# Altium PCB FPv1.3.2.PcbDoc (part 5 of 9)
Units mm, origin at the board's own origin, x right, y up, seen from the top; angles counter-clockwise.
Board outline 81.28 x 53.34 mm, 4 copper layers (Top Layer, GROUND PLANE, POWER PLANE, Bottom Layer); 98 components, 183 nets, 614 pads, 312 vias.
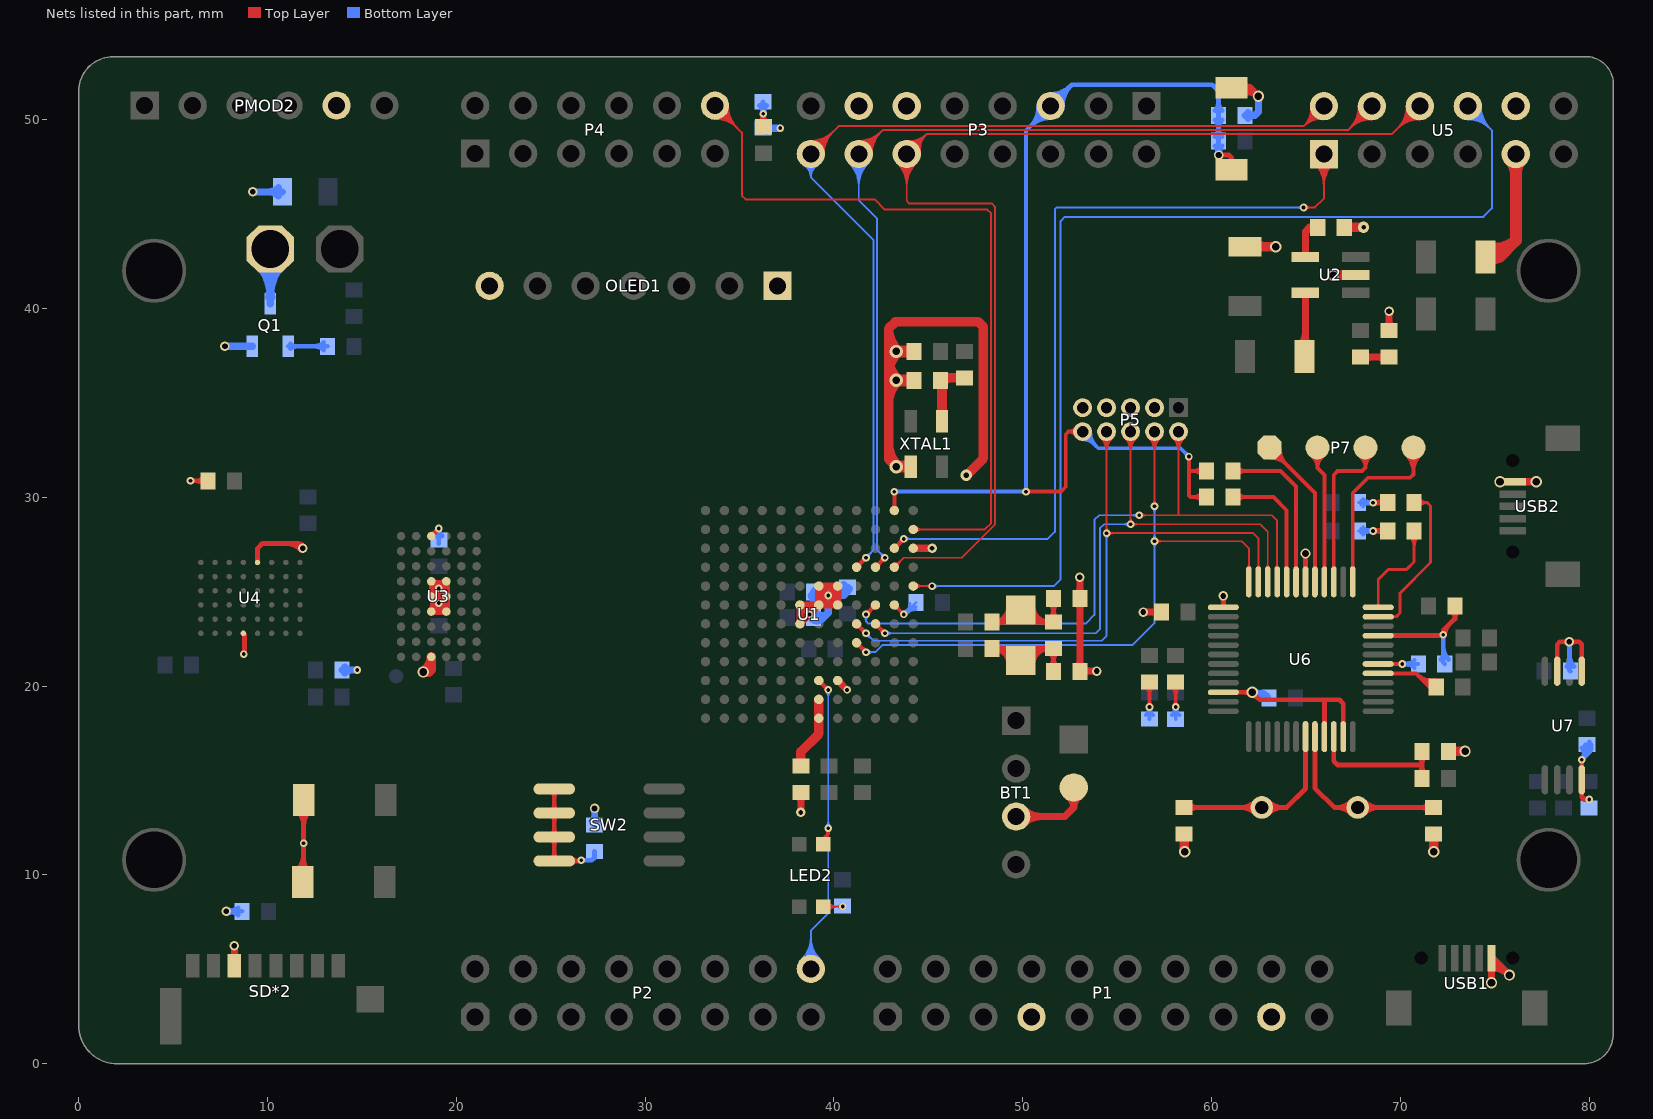
[diagram p7: the nets of this part, all layers, seen from the top]

## Via types
v1: diameter 0.403, hole 0.2, Top Layer to Bottom Layer, tented both sides, 261 vias
v2: diameter 0.503, hole 0.3, Top Layer to Bottom Layer, tented both sides, 25 vias
v3: diameter 0.6, hole 0.4, Top Layer to Bottom Layer, tented both sides, 11 vias
v4: diameter 0.508, hole 0.33, Top Layer to Bottom Layer, tented both sides, 5 vias
v5: diameter 0.703, hole 0.4, Top Layer to Bottom Layer, tented both sides, 3 vias
v6: diameter 0.603, hole 0.4, Top Layer to Bottom Layer, tented both sides, 2 vias
v7: diameter 0.503, hole 0.25, Top Layer to Bottom Layer, tented both sides, 2 vias
v8: diameter 0.6, hole 0.24, Top Layer to Bottom Layer, tented both sides, 1 vias
v9: diameter 0.508, hole 0.349, Top Layer to Bottom Layer, tented both sides, 1 vias
v10: diameter 0.603, hole 0.3, Top Layer to Bottom Layer, tented both sides, 1 vias

## Nets (pads, with @x,y where several pads share a name; then routed paths per layer and width w, separated by ;. In a path a pad name is that pad's centre, name@x,y a point inside that pad or via, vN(x,y) a via of type N, cw(c..) or ccw(c..) an arc to the next point about the centre after c; other vN are vias at no path point) (continued)
FTM3_CH7: LED2.3 P2.16 U1.G3 | length 33.8
  Top Layer w0.102: U1.G3@39.2,20.101 cw(c39.2,19.62) 39.54,19.96 cw(c39.88,20.3) U1.G3@39.399,20.3 ; U1.G3@39.2,20.3 v1(39.7,19.8) ; U1.G3@39.295,20.101 cw(c39.018,19.621) v1@39.554,19.762 ; LED2.3@39.322,11.936 ccw(c39.127,12.475) v1(39.7,12.475) LED2.3@39.7,11.891 ; LED2.3@39.357,11.841 ccw(c39.18,12.33) v1@39.7,12.33 ; LED2.3@39.392,11.745 ccw(c39.232,12.185) 39.7,12.185 ; U1.G3@39.399,20.205 ccw(c39.879,20.482) v1@39.738,19.946 ; LED2.3@39.426,11.65 ccw(c39.285,12.04) 39.7,12.04 ; 39.506,19.98 cw(c39.349,19.708) v1@39.653,19.788 ; 39.511,19.977 cw(c39.458,19.885) v1@39.558,19.85 ; 39.52,19.994 ccw(c39.792,20.151) v1@39.712,19.847 ; 39.523,19.989 ccw(c39.615,20.042) v1@39.65,19.942 ; v1@39.549,19.8 ccw(c39.185,19.8) 39.443,20.057 ccw(c39.7,20.315) v1@39.7,19.951 ; v1@39.583,12.38 cw(c39.414,12.245) 39.623,12.189 cw(c39.832,12.133) v1@39.754,12.334 ; v1@39.589,12.374 cw(c39.398,12.2) 39.647,12.133 ; v1@39.593,12.368 cw(c39.336,12.111) 39.7,12.111 cw(c40.064,12.111) v1@39.807,12.368 ; 39.666,12.201 cw(c39.893,12.14) v1@39.775,12.344 ; 39.537,19.962 ccw(c39.619,20.104) 39.661,19.946 cw(c39.619,20.104) 39.537,19.962 ; 39.538,19.963 cw(c39.396,19.881) 39.554,19.839 ccw(c39.396,19.881) 39.538,19.963
  Bottom Layer w0.102: P2.16@38.287,5.519 ccw(c37.093,6.713) 38.781,6.713 ccw(c40.469,6.713) P2.16@39.275,5.519 ; P2.16@38.358,5.448 ccw(c37.338,6.468) 38.781,6.468 ccw(c40.224,6.468) P2.16@39.204,5.448 ; P2.16@38.43,5.376 ccw(c37.584,6.222) 38.781,6.222 ccw(c39.978,6.222) P2.16@39.132,5.376 ; P2.16@38.502,5.304 ccw(c37.829,5.977) 38.781,5.977 ccw(c39.733,5.977) P2.16@39.06,5.304 ; P2.16@38.781,5.025 38.781,7.056 39.7,7.975 v1(39.7,12.475) v1(39.7,19.8) ; v1@39.593,12.368 cw(c39.336,12.111) 39.7,12.111 cw(c40.064,12.111) v1@39.807,12.368 ; v1@39.593,12.582 ccw(c39.336,12.839) 39.7,12.839 ccw(c40.064,12.839) v1@39.807,12.582 ; v1@39.593,19.693 cw(c39.336,19.436) 39.7,19.436 cw(c40.064,19.436) v1@39.807,19.693
GND: BT1.3 C1.1 C2.1 C3.1 C4.1 C7.1 C8.2 C12.2 C13.1 C15.1 C16.1 C17.1 C18.1 C22.1 C24.2 C27.1 C28.1 C29.1 C32.2 C33.1 C34.1 C35.2 C36.1 C37.1 C38.1 OLED1.1 OLED1.7 P1.7 P1.17 P3.11 P3.13 P5.3 P5.5 P5.7 P5.9 P6.2 PMOD2.5 Q1.2 R6.1 R10.1 R30.1 R31.1 R34.1 S1.2 S2.2 S3.1 SD*2.6 U1.F6 U1.F7 U1.G7 U1.G8 U1.H3 U1.H7 U1.H8 U1.M10 U2.2 U3.A3 U3.D3 U3.D4 U3.E3 U3.E4 U3.F3 U3.F4 U3.J3 U4.D1 U4.E6 U5.9 U5.10 U6.9 U6.18 U6.25 U6.34 U6.45 U6.47 U7.5 U7.7 USB1.5 USB2.5 XTAL1.2 | length 203
  Top Layer w0.254: v1(5.925,30.875) C3.1@6.85,30.875 ; C3.1@6.657,30.682 ccw(c6.191,30.216) 6.191,30.875 ccw(c6.191,31.534) C3.1@6.657,31.068 ; v1@8.697,21.753 ccw(c8.497,21.953) 8.78,21.953 ; U4.E6@8.712,22.787 cw(c8.548,22.623) 8.78,22.623 ; U4.E6@8.725,22.8 8.78,22.745 8.78,21.73 v1(8.75,21.7) ; U4.D1@9.475,26.55 9.475,27.304 9.726,27.556 11.611,27.556 v2(11.862,27.305) ; 10.956,27.556 cw(c10.956,26.399) v2@11.774,27.217 ; S2.2@11.549,10.217 ccw(c10.664,11.102) 11.916,11.102 ; 11.569,27.556 cw(c11.569,27.013) v2@11.953,27.397 ; S1.2@11.599,13.383 cw(c10.834,12.618) 11.916,12.618 cw(c12.998,12.618) S1.2@12.233,13.383 ; S2.2@11.729,10.037 ccw(c11.277,10.489) 11.916,10.489 ; v2@11.737,27.305 ccw(c11.437,27.305) 11.649,27.518 ccw(c11.862,27.73) v2@11.862,27.429 ; S2.2@11.916,9.675 S1.2@11.916,13.975 ; 11.916,10.861 ccw(c12.827,10.861) S2.2@12.183,10.217 ; U3.F3@18.675,23.95 U3.F3@18.794,24.069 ; U3.E3@18.675,24.652 cw(c18.675,24.415) 18.842,24.583 cw(c19.01,24.75) U3.E3@18.773,24.75 ; U3.D3@18.675,25.452 cw(c18.675,25.215) 18.842,25.383 cw(c19.01,25.55) U3.D3@18.773,25.55 ; U3.D3@18.675,25.55 18.75,25.475 18.794,25.431 v1@19.075,25.15 ; U3.A3@18.675,27.95 v1(19.075,28.35) ; U3.A3@18.675,28.048 ccw(c18.675,28.285) 18.842,28.117 ccw(c19.01,27.95) U3.A3@18.773,27.95 ; U3.E3@18.75,24.825 U3.E3@18.675,24.75 18.794,24.631 v1@19.075,24.35 ; 18.862,24.563 ccw(c19.075,24.775) v1@19.075,24.475 ; 18.905,25.32 ccw(c19.075,25.49) v1@19.075,25.249 ; U3.D4@19.356,25.431 U3.D4@19.475,25.55 ; v2@60.537,24.687 cw(c60.324,24.474) 60.625,24.474 cw(c60.926,24.474) v2@60.713,24.687 ; U6.34@60.625,19.675 v3(62.15,19.675) 62.55,19.275 66.775,19.275 66.975,19.075 U6.47@66.975,17.325 ; U6.25@60.625,24.175 v2(60.625,24.775) ; v3@62.028,19.553 ccw(c61.732,19.257) 61.732,19.675 ccw(c61.732,20.093) v3@62.028,19.797 ; v3@62.15,19.502 cw(c62.15,19.084) 62.445,19.38 cw(c62.741,19.675) v3@62.323,19.675 ; v9@64.885,26.935 cw(c64.668,26.718) 64.975,26.718 cw(c65.282,26.718) v9@65.065,26.935 ; U6.18@64.975,25.525 v9(64.975,27.025) ; U6.45@65.975,17.325 65.975,19.225 ; U6.9@68.825,22.675 72.25,22.675 72.275,22.7 v1(72.275,22.725) 72.275,22.948 72.887,23.561 ; 71.974,22.675 ccw(c71.974,23.026) v1@72.222,22.778 ; v1@72.349,22.725 cw(c73.068,22.725) 72.56,23.233 ; C29.1@72.702,23.986 cw(c72.307,23.561) 72.887,23.561 ; C29.1@72.887,24.236 72.887,23.561 ; C29.1@73.073,23.986 ccw(c73.468,23.561) 72.887,23.561 ; U7.7@78.304,20.791 78.304,22.204 78.45,22.35 v2(78.95,22.35) 79.475,22.35 79.604,22.221 U7.5@79.604,20.791 ; v2@78.862,22.262 ccw(c78.649,22.049) 78.649,22.35 ccw(c78.649,22.651) v2@78.862,22.438 ; v2@79.038,22.262 cw(c79.251,22.049) 79.251,22.35 cw(c79.251,22.651) v2@79.038,22.438
  Top Layer w0.381: SD*2.6@8.134,5.575 ccw(c7.855,5.854) 8.25,5.854 ; SD*2.6@8.247,5.187 8.25,5.19 v2(8.25,6.25) v2@8.247,6.247 ; 8.25,5.84 ccw(c8.625,5.84) SD*2.6@8.36,5.575 ; U3.F3@18.651,23.974 ccw(c18.304,24.321) 18.794,24.321 ; U3.E3@18.651,24.726 cw(c18.304,24.379) 18.794,24.379 ; U3.E3@18.651,24.774 ccw(c18.411,25.014) 18.75,25.014 ; U3.D3@18.651,25.526 cw(c18.411,25.286) 18.75,25.286 ; U3.F3@18.675,23.95 U3.F4@19.475,23.95 ; U3.D3@18.699,25.574 ccw(c19.046,25.921) 19.046,25.431 ; U3.E3@18.75,24.697 cw(c19.246,24.697) v1@19.079,25.165 ; U3.D3@18.75,25.475 U3.E3@18.75,24.825 ; U3.F3@18.794,23.966 cw(c19.252,23.966) v1@19.079,24.39 ; U3.E3@18.794,24.631 18.794,24.069 v1@19.075,24.35 ; v1@19.064,25.174 ccw(c18.794,25.161) 18.794,25.431 U3.D4@19.356,25.431 ; v1@19.086,24.399 cw(c19.475,24.359) U3.E4@19.475,24.75 ; v1@19.086,25.174 cw(c19.356,25.161) U3.D4@19.356,25.431 ; 19.104,25.431 ccw(c19.104,25.921) U3.D4@19.451,25.574 ; U3.D4@19.475,25.55 U3.E4@19.475,24.75 ; R30.1@38.102,14.227 cw(c37.744,13.869) 38.25,13.869 cw(c38.756,13.869) R30.1@38.398,14.227 ; U1.F6@38.2,23.3 U1.F6@38.21,23.31 ; U1.F7@38.2,24.3 U1.F7@38.21,24.29 ; v7(38.25,13.312) R30.1@38.25,14.375 ; U1.H3@40.2,20.3 v1(40.7,19.8) ; U1.M10@44.2,27.3 v7(45.2,27.3) ; BT1.3@49.65,13.095 52.22,13.095 52.7,13.575 ; BT1.3@50.046,12.699 cw(c51.001,11.744) 51.001,13.095 cw(c51.001,14.446) BT1.3@50.046,13.491 ; P6.2@52.384,14.173 cw(c51.976,13.575) 52.7,13.575 ; P6.2@52.7,14.635 52.7,13.575 ; C38.1@52.877,20.963 ccw(c52.519,21.321) 53.025,21.321 ccw(c53.531,21.321) 53.173,20.963 ccw(c53.567,21.357) 53.567,20.8 ; C37.1@52.877,24.442 cw(c52.519,24.084) 53.025,24.084 cw(c53.531,24.084) C37.1@53.173,24.442 ; C37.1@52.877,24.838 ccw(c52.519,25.196) 53.025,25.196 ccw(c53.531,25.196) C37.1@53.173,24.838 ; P6.2@53.016,14.173 ccw(c53.424,13.575) 52.7,13.575 ; v2(53.025,25.775) C38.1@53.025,20.765 53.06,20.8 v2(53.925,20.8) ; C38.1@53.173,20.667 cw(c53.495,20.345) 53.495,20.8 ; v2(56.375,23.925) C28.1@57.35,23.925 ; C28.1@57.202,23.777 ccw(c56.844,23.419) 56.844,23.925 ccw(c56.844,24.431) C28.1@57.202,24.073 ; S3.1@61.05,51.691 62.025,51.691 ; S3.1@61.327,51.688 cw(c61.661,51.11) 62.133,51.582 ; S3.1@61.518,51.358 cw(c61.919,50.666) v6(62.484,51.232) 62.025,51.691 ; S3.1@61.65,51.485 cw(c62.025,51.246) 62.025,51.691 ; S3.1@61.65,51.897 ccw(c62.025,52.136) 62.025,51.691 ; R31.1@69.252,38.973 ccw(c68.894,39.331) 69.4,39.331 ccw(c69.906,39.331) R31.1@69.548,38.973 ; R31.1@69.4,38.825 v2(69.4,39.85) ; USB1.5@74.823,5.471 cw(c74.825,5.041) 75.129,5.346 ; v3(74.825,4.3) USB1.5@74.825,5.6 ; USB1.5@74.825,5.091 cw(c74.832,3.757) v3(75.775,4.7) USB1.5@74.875,5.6 ; v3(75.275,30.825) USB2.5@75.95,30.825 v3(77.2,30.825) ; U3.E3@18.75,24.825 v1@19.075,25.15 ; U3.E3@18.75,24.825 18.825,24.75 U3.E4@19.475,24.75 ; v1@19.075,24.35 U3.E4@19.475,24.75 ; v1@19.075,24.35 U3.F4@19.475,23.95 ; v1@19.075,25.15 U3.D4@19.356,25.431 ; v1@19.075,25.15 19.112,25.112 U3.E4@19.475,24.75 ; U3.F4@19.475,23.95 U3.E4@19.475,24.75 ; U1.F6@38.21,23.31 U1.F7@38.21,24.29 ; U1.F6@38.21,23.31 v1(38.7,23.8) ; U1.F7@38.21,24.29 U1.G7@39.19,24.29 ; U1.F7@38.21,24.29 v1(38.7,23.8) ; v1(38.7,23.8) U1.G7@39.19,24.29 ; U1.G7@39.19,24.29 U1.G7@39.2,24.3 ; U1.G7@39.19,24.29 39.2,24.29 U1.G7@39.2,24.3 ; U1.G7@39.2,24.3 U1.H7@40.2,24.3 ; U1.G7@39.2,24.3 U1.G8@39.2,25.3 ; U1.G7@39.2,24.3 v1(39.7,24.8) ; U1.G8@39.2,25.3 U1.H8@40.2,25.3 ; U1.G8@39.2,25.3 v1(39.7,24.8) ; v1(39.7,24.8) U1.H7@40.2,24.3 ; v1(39.7,24.8) U1.H8@40.2,25.3 ; U1.H7@40.2,24.3 U1.H8@40.2,25.3
  Top Layer w0.508: v3@18.228,20.79 ccw(c17.806,21.55) U3.J3@18.675,21.55 ; v3(18.25,20.75) 18.55,20.75 18.675,20.875 ; v3@18.267,20.793 ccw(c18.409,21.141) 18.675,20.875 ; U3.J3@18.675,21.55 18.675,20.875 ; 42.901,32.824 ccw(c44.5,32.824) v5@43.369,31.694 ; 42.901,35 cw(c44.5,35) v5@43.369,36.131 ; 42.901,36.525 cw(c44.5,36.525) v5@43.369,37.656 ; 42.901,37.4 ccw(c44.5,37.4) v5@43.369,36.269 ; 42.901,38.925 ccw(c44.5,38.925) v5@43.369,37.794 ; v5(43.3,31.625) 42.901,32.024 42.901,38.938 43.256,39.294 47.65,39.294 47.915,39.029 47.915,32.066 v10(47.015,31.166) ; C33.1@58.55,12.175 58.55,11.25 v3(58.575,11.225) ; C12.2@61.8,43.275 v3(63.4,43.275) ; C12.2@62.317,43.083 cw(c62.779,42.621) 62.779,43.275 cw(c62.779,43.929) C12.2@62.317,43.467 ; v3(66.45,41.75) 66.475,41.775 U2.2@67.629,41.775 ; C13.1@67.025,44.3 v8(68.05,44.3) ; C35.2@71.647,12.072 cw(c71.337,11.762) 71.775,11.762 ; C35.2@71.75,12.175 71.775,12.15 v3(71.775,11.225) ; C24.2@72.55,16.55 v3(73.425,16.55)
  Top Layer w0.635: v5@42.977,37.725 C27.1@44.25,37.725 ; v5@43.002,36.2 C36.1@44.25,36.2 ; v5(43.3,31.625) XTAL1.2@44.074,31.625 ; C8.2@74.353,42.673 ccw(c74.697,43.615) 75.406,42.906 ; C8.2@74.5,42.725 75.225,42.725 76.11,43.61 ; C8.2@74.571,43.27 ccw(c75.074,44.646) 76.11,43.61 ; U5.9@75.804,47.869 cw(c75.066,47.131) 76.11,47.131 cw(c77.154,47.131) U5.9@76.416,47.869 ; U5.9@76.11,48.175 76.11,43.61
  Bottom Layer w0.254: v2(7.825,8.075) C17.1@8.65,8.075 ; v2@7.887,7.967 cw(c8.111,7.58) 8.227,8.012 ; v2@7.887,8.183 ccw(c8.111,8.57) 8.227,8.138 ; v2@7.913,7.987 cw(c8.126,7.774) 8.126,8.075 cw(c8.126,8.376) v2@7.913,8.163 ; C17.1@8.457,7.882 ccw(c7.991,7.416) 7.991,8.075 ccw(c7.991,8.734) C17.1@8.457,8.268 ; C15.1@18.896,27.956 ccw(c18.552,28.35) v1(19.075,28.35) ; v1(19.075,25.175) v1@19.175,25.175 ; C15.1@19.075,27.55 v1(19.075,28.35) ; C15.1@19.254,27.956 cw(c19.598,28.35) v1(19.075,28.35) ; R6.1@27.132,12.843 ccw(c26.666,13.309) 27.325,13.309 ccw(c27.984,13.309) R6.1@27.518,12.843 ; v2@27.217,13.463 cw(c26.792,13.217) 27.266,13.09 ; v2@27.237,13.437 cw(c27.024,13.224) 27.325,13.224 cw(c27.626,13.224) v2@27.413,13.437 ; R6.1@27.325,12.65 v2(27.325,13.525) ; 27.384,13.09 cw(c27.858,13.217) v2@27.433,13.463 ; v3@62.242,19.529 cw(c62.437,19.221) 62.531,19.573 cw(c62.626,19.925) v3@62.303,19.755 ; v3@62.272,19.553 cw(c62.568,19.257) 62.568,19.675 cw(c62.568,20.093) v3@62.272,19.797 ; 62.587,19.675 cw(c62.587,19.161) C22.1@63.033,19.416 ; C22.1@62.75,19.675 v3(62.15,19.675) cw(c62.15,18.912) C22.1@62.813,19.29 ; C32.2@72.157,21.418 ccw(c71.872,21.703) 72.275,21.703 ; 72.275,22.065 ccw(c73.19,22.065) C32.2@72.543,21.418 ; v1(72.275,22.725) 72.275,21.25 C32.2@72.35,21.175 ; C34.1@78.811,21.034 ccw(c78.475,21.37) 78.95,21.37 ; v2@78.862,22.262 cw(c78.649,22.049) 78.95,22.049 cw(c79.251,22.049) v2@79.038,22.262 ; 78.95,21.63 ccw(c79.793,21.63) C34.1@79.197,21.034 ; v2(78.95,22.35) 78.95,20.845 C34.1@79.004,20.791
  Bottom Layer w0.381: v2(7.75,38) Q1.2@9.2,38 ; v2(9.225,46.175) C4.1@10.8,46.175 ; C4.1@10.581,45.956 ccw(c10.053,45.428) 10.053,46.175 ccw(c10.053,46.922) C4.1@10.581,46.394 ; C16.1@13.95,20.85 v1@14.754,20.85 ; C16.1@14.098,20.702 cw(c14.456,20.344) 14.456,20.85 cw(c14.456,21.356) C16.1@14.098,20.998 ; R34.1@36.25,49.55 v1@37.155,49.55 ; R34.1@36.448,49.402 cw(c36.806,49.044) 36.806,49.55 cw(c36.806,50.056) R34.1@36.448,49.698 ; C1.1@38.692,23.808 ccw(c38.125,24.375) 38.927,24.375 ; C1.1@38.698,23.789 cw(c38.662,23.526) C1.1@38.927,23.526 ; C1.1@38.708,23.808 ccw(c39.095,24.195) C1.1@39.095,23.647 ; C1.1@38.71,23.803 ccw(c38.927,23.876) C1.1@38.927,23.647 ; C1.1@38.779,23.846 ccw(c38.421,24.203) 38.927,24.203 ccw(c39.433,24.203) C1.1@39.075,23.846 ; C2.1@38.779,24.795 cw(c38.421,24.438) 38.927,24.438 cw(c39.433,24.438) C2.1@39.075,24.795 ; C1.1@38.814,23.568 ccw(c39.103,23.898) 39.412,23.588 ; C1.1@39.065,23.855 ccw(c39.371,24.204) 39.7,23.876 ; C1.1@39.075,23.499 cw(c39.433,23.142) 39.433,23.647 cw(c39.433,24.153) C1.1@39.075,23.796 ; C2.1@39.075,24.895 cw(c39.898,24.072) 39.898,25.236 ; C2.1@39.085,25.081 ccw(c39.7,25.613) v1(39.7,24.8) ; C2.1@39.121,24.8 v1(39.7,24.8) ; 40.27,24.8 ccw(c40.27,25.4) R10.1@40.825,25.171 ; R10.1@40.473,25.316 cw(c39.7,25.636) v1(39.7,24.8) ; R10.1@40.518,25.088 ccw(c40.16,24.731) 40.16,25.236 ccw(c40.16,25.742) R10.1@40.518,25.385 ; C7.1@61.775,50.225 62.29,50.225 62.484,50.419 v6(62.484,51.232) ; C7.1@61.923,50.077 cw(c62.281,49.719) 62.281,50.225 cw(c62.281,50.731) C7.1@61.923,50.373 ; C1.1@38.927,23.647 39.472,23.647 39.7,23.876 ; C1.1@38.927,23.647 C2.1@38.927,24.994 39.17,25.236 R10.1@40.716,25.236 40.716,24.987 40.529,24.8 v1(39.7,24.8) ; 39.7,23.876 v1(39.7,24.8)
  Bottom Layer w0.508: v1(19.075,24.4) v1@19.075,25.15
  other v1: 11.916,11.675 14.757,20.853 37.16,49.555
  other v5: 43.3,36.2 43.3,37.725
GPIOH0: P7.3 U6.15 | length 11
  Top Layer w0.203: U6.15@66.475,25.525 66.475,31.194 66.675,31.394 67.97,31.394 68.148,31.572 ; P7.3@67.828,32.212 cw(c67.348,31.572) 68.148,31.572 ; P7.3@67.95,32.375 cw(c67.653,31.979) 68.148,31.979 cw(c68.643,31.979) P7.3@68.346,32.375 ; P7.3@68.148,32.639 68.148,31.572 ; P7.3@68.468,32.212 ccw(c68.948,31.572) 68.148,31.572
GPIOH1: P7.4 U6.13 | length 13
  Top Layer w0.203: U6.13@67.475,25.525 67.475,30.239 68.275,31.039 70.51,31.039 70.688,31.217 P7.4@70.688,32.639 ; P7.4@70.311,32.262 cw(c69.4,31.351) 70.688,31.351 cw(c71.976,31.351) P7.4@71.065,32.262 ; P7.4@70.455,32.406 cw(c69.891,31.842) 70.688,31.842 cw(c71.485,31.842) P7.4@70.922,32.406
GPIOH2: L2.2 U6.12 | length 7.6
  Top Layer w0.152: U6.12@68.773,24.227 ccw(c68.647,24.353) 68.825,24.353 ccw(c69.003,24.353) U6.12@68.877,24.227 ; U6.12@68.825,24.175 68.825,25.645 69.367,26.187 70.333,26.187 70.728,26.583 L2.2@70.728,28.219 ; L2.2@70.499,27.94 cw(c69.946,27.388) 70.728,27.388 cw(c71.51,27.388) L2.2@70.957,27.94 ; L2.2@70.607,28.048 cw(c70.314,27.756) 70.728,27.756 cw(c71.142,27.756) L2.2@70.849,28.048
GPIOH3: L6.2 U6.11 | length 9.8
  Top Layer w0.152: U6.11@68.825,23.675 69.776,23.675 69.977,23.876 69.977,24.917 71.603,26.543 71.603,29.54 71.425,29.718 ; U6.11@69.552,23.623 cw(c69.678,23.497) 69.678,23.675 cw(c69.678,23.853) U6.11@69.552,23.727 ; L6.2@70.728,29.718 71.425,29.718 ; L6.2@70.975,29.509 cw(c71.425,29.13) 71.425,29.718 ; L6.2@70.975,29.927 ccw(c71.425,30.306) 71.425,29.718
GPIOL0: R8.2 U6.20 | length 8.1
  Top Layer w0.203: R8.2@61.127,30.023 63.271,30.023 63.975,29.319 U6.20@63.975,25.525 ; R8.2@61.338,29.812 cw(c61.847,29.302) 61.847,30.023 cw(c61.847,30.743) R8.2@61.338,30.234
GPIOL1: R11.2 U6.19 | length 9.9
  Top Layer w0.203: R11.2@61.127,31.394 63.652,31.394 64.475,30.572 U6.19@64.475,25.525 ; R11.2@61.338,31.183 cw(c61.847,30.674) 61.847,31.394 cw(c61.847,32.115) R11.2@61.338,31.605
GPIOL2: P7.1 U6.17 | length 11.4
  Top Layer w0.203: P7.1@63.068,32.106 cw(c63.068,30.818) 63.979,31.728 cw(c64.889,32.639) P7.1@63.602,32.639 ; P7.1@63.068,32.309 cw(c63.068,31.512) 63.632,32.075 cw(c64.196,32.639) P7.1@63.398,32.639 ; P7.1@63.068,32.639 65.475,30.232 U6.17@65.475,25.525
GPIOL3: P7.2 U6.16 | length 9.8
  Top Layer w0.203: P7.2@65.28,32.218 cw(c64.757,31.547) 65.608,31.547 ; P7.2@65.405,32.379 cw(c65.081,31.963) 65.608,31.963 cw(c66.135,31.963) P7.2@65.811,32.379 ; P7.2@65.608,32.639 65.608,31.547 ; P7.2@65.936,32.218 ccw(c66.46,31.547) 65.608,31.547 ; U6.16@65.975,25.525 65.975,31.18 65.608,31.547
JTAG_TCK: P5.4 U1.J5 U6.24 | length 45
  Top Layer w0.102: U1.J5@41.2,22.101 cw(c41.2,21.62) 41.54,21.96 cw(c41.88,22.3) U1.J5@41.399,22.3 ; U1.J5@41.2,22.3 v1(41.7,21.8) ; U1.J5@41.295,22.101 cw(c41.018,21.621) v1@41.554,21.762 ; U1.J5@41.399,22.205 ccw(c41.879,22.482) v1@41.738,21.946 ; 41.506,21.98 cw(c41.349,21.708) v1@41.653,21.788 ; 41.511,21.977 cw(c41.458,21.885) v1@41.558,21.85 ; 41.52,21.994 ccw(c41.792,22.151) v1@41.712,21.847 ; 41.523,21.989 ccw(c41.615,22.042) v1@41.65,21.942 ; v1@41.549,21.8 ccw(c41.185,21.8) 41.443,22.057 ccw(c41.7,22.315) v1@41.7,21.951 ; P5.4@56.662,33.162 cw(c55.896,32.396) 56.98,32.396 cw(c58.064,32.396) P5.4@57.298,33.162 ; P5.4@56.734,33.234 cw(c56.141,32.641) 56.98,32.641 cw(c57.819,32.641) P5.4@57.226,33.234 ; P5.4@56.806,33.306 cw(c56.386,32.886) 56.98,32.886 cw(c57.574,32.886) P5.4@57.154,33.306 ; v1@56.873,29.637 ccw(c56.616,29.894) 56.98,29.894 ccw(c57.344,29.894) v1@57.087,29.637 ; v1(56.98,27.675) 61.6,27.675 61.975,27.3 U6.24@61.975,25.525 ; v1(56.98,29.53) P5.4@56.98,33.48 ; v1@57.087,27.568 cw(c57.344,27.311) 57.344,27.675 cw(c57.344,28.039) v1@57.087,27.782 ; U6.24@61.905,26.27 ccw(c61.736,26.439) 61.975,26.439 ccw(c62.214,26.439) U6.24@62.045,26.27 ; 41.537,21.962 ccw(c41.619,22.104) 41.661,21.946 cw(c41.619,22.104) 41.537,21.962 ; 41.538,21.963 cw(c41.396,21.881) 41.554,21.839 ccw(c41.396,21.881) 41.538,21.963
  Bottom Layer w0.102: v1(41.7,21.8) 42.196,21.8 42.57,22.174 55.804,22.174 56.98,23.35 v1(56.98,27.675) v1(56.98,29.53) ; v1@41.807,21.693 cw(c42.064,21.436) 42.064,21.8 cw(c42.064,22.164) v1@41.807,21.907 ; v1@56.873,27.568 cw(c56.616,27.311) 56.98,27.311 cw(c57.344,27.311) v1@57.087,27.568 ; v1@56.873,27.782 ccw(c56.616,28.039) 56.98,28.039 ccw(c57.344,28.039) v1@57.087,27.782 ; v1@56.873,29.423 cw(c56.616,29.166) 56.98,29.166 cw(c57.344,29.166) v1@57.087,29.423
JTAG_TDI: P5.8 U1.J6 U6.23 | length 45.1
  Top Layer w0.102: U1.J6@41.2,23.101 cw(c41.2,22.62) 41.54,22.96 cw(c41.88,23.3) U1.J6@41.399,23.3 ; U1.J6@41.2,23.3 v1(41.7,22.8) ; U1.J6@41.295,23.101 cw(c41.018,22.621) v1@41.554,22.762 ; U1.J6@41.399,23.205 ccw(c41.879,23.482) v1@41.738,22.946 ; 41.506,22.98 cw(c41.349,22.708) v1@41.653,22.788 ; 41.511,22.977 cw(c41.458,22.885) v1@41.558,22.85 ; 41.52,22.994 ccw(c41.792,23.151) v1@41.712,22.847 ; 41.523,22.989 ccw(c41.615,23.042) v1@41.65,22.942 ; v1@41.549,22.8 ccw(c41.185,22.8) 41.443,23.057 ccw(c41.7,23.315) v1@41.7,22.951 ; P5.8@54.122,33.162 cw(c53.356,32.396) 54.44,32.396 cw(c55.524,32.396) P5.8@54.758,33.162 ; P5.8@54.194,33.234 cw(c53.601,32.641) 54.44,32.641 cw(c55.279,32.641) P5.8@54.686,33.234 ; P5.8@54.266,33.306 cw(c53.846,32.886) 54.44,32.886 cw(c55.034,32.886) P5.8@54.614,33.306 ; v1@54.333,28.207 ccw(c54.076,28.464) 54.44,28.464 ccw(c54.804,28.464) 54.547,28.207 ccw(c54.804,28.464) 54.804,28.1 ccw(c54.804,27.736) v1@54.547,27.993 ; P5.8@54.44,33.48 v1(54.44,28.1) 62.2,28.1 62.475,27.825 U6.23@62.475,25.525 ; U6.23@62.405,26.27 ccw(c62.236,26.439) 62.475,26.439 ccw(c62.714,26.439) U6.23@62.545,26.27 ; 41.537,22.962 ccw(c41.619,23.104) 41.661,22.946 cw(c41.619,23.104) 41.537,22.962 ; 41.538,22.963 cw(c41.396,22.881) 41.554,22.839 ccw(c41.396,22.881) 41.538,22.963
  Bottom Layer w0.102: v1@41.7,22.649 cw(c41.7,22.285) 41.957,22.543 cw(c42.215,22.8) v1@41.851,22.8 ; v1(41.7,22.8) 42.097,22.403 54.178,22.403 54.44,22.665 v1(54.44,28.1) ; v1@54.333,27.993 cw(c54.076,27.736) 54.44,27.736 cw(c54.804,27.736) v1@54.547,27.993
JTAG_TDO: P5.6 U1.K6 U6.22 | length 44.4
  Top Layer w0.102: U1.K6@42.2,23.101 cw(c42.2,22.62) 42.54,22.96 cw(c42.88,23.3) U1.K6@42.399,23.3 ; U1.K6@42.2,23.3 v1(42.7,22.8) ; U1.K6@42.295,23.101 cw(c42.018,22.621) v1@42.554,22.762 ; U1.K6@42.399,23.205 ccw(c42.879,23.482) v1@42.738,22.946 ; 42.506,22.98 cw(c42.349,22.708) v1@42.653,22.788 ; 42.511,22.977 cw(c42.458,22.885) v1@42.558,22.85 ; 42.52,22.994 ccw(c42.792,23.151) v1@42.712,22.847 ; 42.523,22.989 ccw(c42.615,23.042) v1@42.65,22.942 ; v1@42.549,22.8 ccw(c42.185,22.8) 42.443,23.057 ccw(c42.7,23.315) v1@42.7,22.951 ; P5.6@55.392,33.162 cw(c54.626,32.396) 55.71,32.396 cw(c56.794,32.396) P5.6@56.028,33.162 ; P5.6@55.464,33.234 cw(c54.871,32.641) 55.71,32.641 cw(c56.549,32.641) P5.6@55.956,33.234 ; P5.6@55.536,33.306 cw(c55.116,32.886) 55.71,32.886 cw(c56.304,32.886) P5.6@55.884,33.306 ; v1@55.603,28.682 ccw(c55.346,28.939) 55.71,28.939 ccw(c56.074,28.939) 55.817,28.682 ccw(c56.074,28.939) 56.074,28.575 ccw(c56.074,28.211) v1@55.817,28.468 ; P5.6@55.71,33.48 v1(55.71,28.575) 62.575,28.575 62.975,28.175 U6.22@62.975,25.525 ; U6.22@62.905,26.27 ccw(c62.736,26.439) 62.975,26.439 ccw(c63.214,26.439) U6.22@63.045,26.27 ; 42.537,22.962 ccw(c42.619,23.104) 42.661,22.946 cw(c42.619,23.104) 42.537,22.962 ; 42.538,22.963 cw(c42.396,22.881) 42.554,22.839 ccw(c42.396,22.881) 42.538,22.963
  Bottom Layer w0.102: v1(42.7,22.8) 53.864,22.8 54.086,23.022 54.086,28.356 54.305,28.575 v1(55.71,28.575) v1@55.725,28.575 ; v1@42.807,22.693 cw(c43.064,22.436) 43.064,22.8 cw(c43.064,23.164) v1@42.807,22.907 ; v1@55.603,28.468 ccw(c55.346,28.211) 55.346,28.575 ccw(c55.346,28.939) v1@55.603,28.682
JTAG_TMS: P5.2 U1.K7 U6.21 | length 45.6
  Top Layer w0.102: v1@41.662,23.946 ccw(c41.521,24.482) U1.K7@42.001,24.205 ; v1@41.688,23.847 ccw(c41.608,24.151) 41.88,23.994 ; v1(41.7,23.8) U1.K7@42.2,24.3 ; v1@41.7,23.951 ccw(c41.7,24.315) 41.957,24.057 ccw(c42.215,23.8) v1@41.851,23.8 ; v1@41.747,23.788 cw(c42.051,23.708) 41.894,23.98 ; v1@41.75,23.942 ccw(c41.785,24.042) 41.877,23.989 ; v1@41.842,23.85 cw(c41.942,23.885) 41.889,23.977 ; v1@41.846,23.762 cw(c42.382,23.621) U1.K7@42.105,24.101 ; U1.K7@42.001,24.3 cw(c41.52,24.3) 41.86,23.96 cw(c42.2,23.62) U1.K7@42.2,24.101 ; v1(56.175,29.05) 58.25,29.05 ; v1@56.282,28.943 cw(c56.539,28.686) 56.539,29.05 cw(c56.539,29.414) v1@56.282,29.157 ; P5.2@57.932,33.162 cw(c57.166,32.396) 58.25,32.396 cw(c59.334,32.396) P5.2@58.568,33.162 ; P5.2@58.004,33.234 cw(c57.411,32.641) 58.25,32.641 cw(c59.089,32.641) P5.2@58.496,33.234 ; P5.2@58.076,33.306 cw(c57.656,32.886) 58.25,32.886 cw(c58.844,32.886) P5.2@58.424,33.306 ; P5.2@58.25,33.48 58.25,29.05 ; U6.21@63.405,26.27 ccw(c63.236,26.439) 63.475,26.439 ccw(c63.714,26.439) U6.21@63.545,26.27 ; U6.21@63.475,25.525 63.475,28.75 63.175,29.05 58.25,29.05 ; v1@41.739,23.946 ccw(c41.781,24.104) 41.863,23.962 cw(c41.781,24.104) v1@41.739,23.946 ; v1@41.846,23.839 cw(c42.004,23.881) 41.862,23.963 ccw(c42.004,23.881) v1@41.846,23.839
  Bottom Layer w0.102: v1@41.593,23.693 cw(c41.336,23.436) 41.7,23.436 cw(c42.064,23.436) v1@41.807,23.693 ; v1(41.7,23.8) 41.7,23.426 41.808,23.317 53.34,23.317 53.797,23.774 53.797,28.804 54.044,29.05 v1(56.175,29.05) ; v1@56.068,28.943 ccw(c55.811,28.686) 55.811,29.05 ccw(c55.811,29.414) v1@56.068,29.157
LPTMR0: P4.12 U1.M11 | length 48.7
  Top Layer w0.102: P4.12@33.701,50.046 cw(c33.701,48.358) 34.895,49.551 cw(c36.088,50.745) P4.12@34.4,50.745 ; P4.12@33.701,50.147 cw(c33.701,48.705) 34.721,49.725 cw(c35.741,50.745) P4.12@34.299,50.745 ; P4.12@33.701,50.249 cw(c33.701,49.052) 34.548,49.898 cw(c35.394,50.745) P4.12@34.197,50.745 ; P4.12@33.701,50.351 cw(c33.701,49.398) 34.374,50.072 cw(c35.048,50.745) P4.12@34.095,50.745 ; P4.12@33.701,50.745 35.125,49.321 35.125,45.975 35.325,45.775 42.15,45.775 42.688,45.237 48.133,45.237 48.322,45.049 48.322,28.634 47.988,28.3 U1.M11@44.2,28.3 ; U1.M11@44.341,28.159 cw(c44.681,27.819) 44.681,28.3 cw(c44.681,28.781) U1.M11@44.341,28.441
N_RST: C7.2 P3.5 P5.10 R8.1 R11.1 R32.2 S3.2 U1.L12 | length 82.3
  Top Layer w0.203: U1.L12@43.095,29.405 ccw(c42.842,29.658) 43.2,29.658 ccw(c43.558,29.658) U1.L12@43.305,29.405 ; v1@43.129,30.229 cw(c42.959,30.059) 43.2,30.059 cw(c43.441,30.059) v1@43.271,30.229 ; U1.L12@43.2,29.3 v1(43.2,30.3) ; v1(50.175,30.3) 52.017,30.3 52.275,30.558 52.275,33.325 52.43,33.48 ; v1@50.246,30.229 cw(c50.416,30.059) 50.416,30.3 cw(c50.416,30.541) v1@50.246,30.371 ; P5.10@52.837,33.261 ccw(c52.43,32.992) 52.43,33.48 ; P5.10@52.837,33.699 cw(c52.43,33.968) 52.43,33.48 ; P5.10@53.17,33.48 52.43,33.48 ; v1@58.73,32.086 cw(c58.56,31.915) 58.801,31.915 cw(c59.042,31.915) v1@58.872,32.086 ; 58.801,31.394 R11.1@59.727,31.394 ; v1(58.801,32.156) 58.801,30.099 58.877,30.023 R8.1@59.727,30.023 ; R8.1@59.516,29.812 ccw(c59.006,29.302) 59.006,30.023 ccw(c59.006,30.743) R8.1@59.516,30.234 ; R11.1@59.516,31.183 ccw(c59.006,30.674) 59.006,31.394 ccw(c59.006,32.115) R11.1@59.516,31.605
  Top Layer w0.254: v4(60.375,48.125) 60.925,48.125 61.05,48 ; v4@60.465,48.035 cw(c60.682,47.818) 60.682,48.125 cw(c60.682,48.432) v4@60.465,48.215 ; S3.2@60.885,47.758 ccw(c60.789,48) 61.05,48 ; S3.2@61.05,47.341 61.05,48 ; S3.2@61.215,47.758 cw(c61.311,48) 61.05,48
  Bottom Layer w0.203: v1(43.2,30.3) v1(50.175,30.3) 50.175,49.424 P3.5@51.476,50.725 ; v1@43.271,30.229 cw(c43.441,30.059) 43.441,30.3 cw(c43.441,30.541) v1@43.271,30.371 ; v1@50.104,30.229 ccw(c49.934,30.059) 49.934,30.3 ccw(c49.934,30.541) 50.104,30.371 ccw(c49.934,30.541) 50.175,30.541 ccw(c50.416,30.541) v1@50.246,30.371 ; P3.5@50.828,50.725 cw(c49.262,50.725) 50.369,49.618 cw(c51.476,48.511) P3.5@51.476,50.077 ; P3.5@51.031,50.725 cw(c49.956,50.725) 50.716,49.965 cw(c51.476,49.205) P3.5@51.476,50.28 ; P5.10@53.17,33.082 cw(c53.17,32.24) 53.765,32.835 ; P5.10@53.17,33.43 54,32.6 58.357,32.6 v1(58.801,32.156) ; P5.10@53.365,33.48 ccw(c53.957,33.48) 53.539,33.061 ; P5.10@53.568,33.48 ccw(c54.651,33.48) 53.885,32.715 ; v1@58.701,32.156 ccw(c58.46,32.156) 58.63,32.327 ccw(c58.801,32.497) v1@58.801,32.256
  Bottom Layer w0.254: P3.5@51.476,50.725 52.601,51.85 60.025,51.85 60.375,51.5 C7.2@60.375,50.225 v4(60.375,48.125) ; P3.5@51.476,51.094 ccw(c51.476,51.985) 52.106,51.355 ccw(c52.736,50.725) P3.5@51.845,50.725 ; P3.5@51.476,51.348 ccw(c51.476,52.852) 52.54,51.789 ccw(c53.603,50.725) P3.5@52.099,50.725 ; R32.2@60.176,48.621 cw(c59.695,48.14) v4@60.375,48.14 ; R32.2@60.176,49.107 ccw(c59.695,49.588) 60.375,49.588 ; C7.2@60.182,49.982 cw(c59.716,49.516) 60.375,49.516 cw(c61.034,49.516) C7.2@60.568,49.982 ; C7.2@60.182,50.468 ccw(c59.716,50.934) 60.375,50.934 ccw(c61.034,50.934) C7.2@60.568,50.468 ; v4@60.265,48.188 ccw(c59.988,48.349) R32.2@60.297,48.432 ; v4@60.285,48.215 ccw(c60.068,48.432) 60.375,48.432 ccw(c60.682,48.432) v4@60.465,48.215 ; 60.302,48.413 ccw(c60.585,48.489) v4@60.438,48.235 ; v4@60.311,48.235 ccw(c60.178,48.467) 60.436,48.397 ; v4@60.375,48.169 cw(c61.014,48.169) R32.2@60.562,48.621 ; 60.375,49.559 ccw(c61.014,49.559) R32.2@60.562,49.107 ; R32.2@60.45,48.451 ccw(c60.784,48.361) v4@60.485,48.188
NetC13_2: C13.2 U2.4 | length 2.2
  Top Layer w0.381: U2.4@64.971,42.725 64.971,44.071 ; 65.2,44.3 64.971,44.071 ; C13.2@65.489,44.091 ccw(c65.241,43.801) 64.971,44.071
NetC24_1: C24.1 R1.2 U6.46 | length 9.6
  Top Layer w0.254: U6.46@66.475,17.325 66.475,16.025 66.675,15.825 71.15,15.825 ; R1.2@70.957,15.343 ccw(c70.491,15.809) 71.15,15.809 ccw(c71.809,15.809) R1.2@71.343,15.343 ; C24.1@70.957,16.307 cw(c70.491,15.841) 71.15,15.841 cw(c71.809,15.841) C24.1@71.343,16.307 ; R1.2@71.15,15.1 C24.1@71.15,16.55
NetC32_1: C32.1 U6.6 | length 4.5
  Top Layer w0.203: U6.6@68.825,21.175 v1(70.1,21.175) ; v1@70.029,21.104 ccw(c69.859,20.934) 69.859,21.175 ccw(c69.859,21.416) v1@70.029,21.246
  Bottom Layer w0.203: v1(70.1,21.175) C32.1@70.925,21.175 ; v1@70.15,21.088 cw(c70.328,20.78) 70.42,21.124 ; v1@70.15,21.262 ccw(c70.328,21.57) 70.42,21.226 ; v1@70.171,21.104 cw(c70.341,20.934) 70.341,21.175 cw(c70.341,21.416) v1@70.171,21.246 ; C32.1@70.739,20.964 ccw(c70.23,20.455) 70.23,21.175 ccw(c70.23,21.895) C32.1@70.739,21.386
NetC33_2: C33.2 U6.43 Y2.2 | length 14.2
  Top Layer w0.254: C33.2@58.55,13.575 63.975,13.575 64.975,14.575 U6.43@64.975,17.325 ; C33.2@58.793,13.382 cw(c59.259,12.916) 59.259,13.575 cw(c59.259,14.234) C33.2@58.793,13.768 ; Y2.2@62.326,13.241 ccw(c61.518,12.433) 61.518,13.575 ccw(c61.518,14.717) Y2.2@62.326,13.909 ; Y2.2@62.994,13.241 cw(c63.802,12.433) 63.802,13.575 cw(c63.802,14.717) Y2.2@62.994,13.909
NetC35_1: C35.1 U6.44 Y2.1 | length 14
  Top Layer w0.254: U6.44@65.475,17.325 65.475,14.6 66.5,13.575 C35.1@71.75,13.575 ; Y2.1@67.406,13.241 ccw(c66.598,12.433) 66.598,13.575 ccw(c66.598,14.717) Y2.1@67.406,13.909 ; Y2.1@68.074,13.241 cw(c68.882,12.433) 68.882,13.575 cw(c68.882,14.717) Y2.1@68.074,13.909 ; C35.1@71.507,13.382 ccw(c71.041,12.916) 71.041,13.575 ccw(c71.041,14.234) C35.1@71.507,13.768
NetC36_2: C36.2 FB2.2 XTAL1.4 | length 4.2
  Top Layer w0.508: C36.2@45.547,36.047 cw(c45.115,35.615) 45.725,35.615 ; XTAL1.4@45.725,34.025 C36.2@45.725,36.125 ; C36.2@45.753,36.147 cw(c46.184,35.716) 46.184,36.325 ; C36.2@45.775,36.325 FB2.2@46.925,36.325
NetC37_2: C37.2 R26.1 R27.1 Y1.1 | length 17.6
  Top Layer w0.254: R26.1@48.572,23.199 cw(c49.038,22.733) 49.038,23.392 cw(c49.038,24.051) R26.1@48.572,23.585 ; R26.1@48.681,23.392 ccw(c48.681,24.235) Y1.1@49.512,24.091 ; 48.983,23.392 ccw(c48.983,24.183) Y1.1@49.762,24.048 ; Y1.1@49.261,24.135 cw(c48.379,24.288) R26.1@48.379,23.392 51.424,23.392 cw(c51.424,24.291) Y1.1@50.538,24.136 ; Y1.1@49.284,23.392 ccw(c49.284,24.131) Y1.1@50.012,24.005 ; Y1.1@49.788,24.004 ccw(c50.517,24.132) Y1.1@50.517,23.392 ; Y1.1@50.038,24.048 ccw(c50.819,24.185) 50.819,23.392 ; Y1.1@50.288,24.092 ccw(c51.122,24.238) 51.122,23.392 ; 50.911,23.392 cw(c50.911,22.726) R27.1@51.382,23.197 ; 50.921,23.392 ccw(c50.921,24.044) R27.1@51.382,23.583 ; R27.1@51.432,23.583 ccw(c50.966,24.049) 51.625,24.049 ccw(c52.284,24.049) R27.1@51.818,23.583 ; C37.2@51.432,24.397 cw(c50.966,23.931) 51.625,23.931 cw(c52.284,23.931) C37.2@51.818,24.397 ; R27.1@51.625,23.39 C37.2@51.625,24.64
NetC38_2: C38.2 R27.2 R28.1 Y1.2 | length 17.6
  Top Layer w0.254: R28.1@48.572,21.802 cw(c49.038,21.336) 49.038,21.995 cw(c49.038,22.654) R28.1@48.572,22.188 ; R28.1@48.679,21.995 cw(c48.679,21.151) Y1.2@49.511,21.291 ; 48.979,21.995 cw(c48.979,21.201) Y1.2@49.762,21.333 ; Y1.2@49.261,21.249 ccw(c48.379,21.101) R28.1@48.379,21.995 51.427,21.995 ccw(c51.427,21.094) Y1.2@50.539,21.246 ; Y1.2@49.279,21.995 cw(c49.279,21.252) Y1.2@50.012,21.375 ; Y1.2@49.788,21.375 cw(c50.523,21.249) Y1.2@50.523,21.995 ; Y1.2@50.038,21.332 cw(c50.824,21.197) 50.824,21.995 ; Y1.2@50.288,21.289 cw(c51.126,21.145) 51.126,21.995 ; 50.904,21.995 cw(c50.904,21.319) R27.2@51.382,21.797 ; 50.928,21.995 ccw(c50.928,22.637) R27.2@51.382,22.183 ; C38.2@51.432,21.008 ccw(c50.966,21.474) 51.625,21.474 ccw(c52.284,21.474) C38.2@51.818,21.008 ; R27.2@51.432,21.797 cw(c50.966,21.331) 51.625,21.331 cw(c52.284,21.331) R27.2@51.818,21.797 ; C38.2@51.625,20.765 R27.2@51.625,21.99
NetF2_1: F2.1 U2.5 | length 4.6
  Top Layer w0.381: F2.1@64.688,38.037 ccw(c64.006,38.719) 64.971,38.719 ; F2.1@64.971,37.45 U2.5@64.971,40.825 ; 64.971,38.497 ccw(c65.622,38.497) F2.1@65.162,38.037
NetL1_2: L1.2 R34.2 | length 3.8
  Top Layer w0.254: L1.2@36.082,49.818 ccw(c35.646,50.254) v1@36.263,50.254 ; v1@36.198,50.276 cw(c35.998,50.16) 36.221,50.1 ; L1.2@36.263,49.638 36.263,50.288 ccw(c36.903,50.288) L1.2@36.463,49.823
  Bottom Layer w0.102: v1@36.25,50.326 v1(36.263,50.313)
  Bottom Layer w0.254: R34.2@36.065,50.75 cw(c35.673,50.326) v1@36.25,50.326 ; 36.25,50.524 ccw(c36.473,50.524) v1@36.315,50.366 ; R34.2@36.25,50.95 v1@36.25,50.326 ; 36.304,50.527 ccw(c36.529,50.467) v1@36.327,50.35 ; R34.2@36.435,50.75 ccw(c36.827,50.326) v1@36.25,50.326
NetL2_1: L2.1 R12.1 | length 8.1
  Top Layer w0.152: v1@68.617,28.111 cw(c68.769,27.849) 68.847,28.141 cw(c68.925,28.433) v1@68.663,28.282 ; v1@68.617,28.328 ccw(c68.769,28.59) 68.847,28.298 ccw(c68.925,28.006) v1@68.663,28.157 ; v1@68.643,28.131 cw(c68.857,27.917) 68.857,28.219 cw(c68.857,28.522) v1@68.643,28.308 ; L2.1@69.097,27.992 ccw(c68.555,27.458) v1(68.555,28.219) ; L2.1@69.097,28.447 cw(c68.555,28.981) v1(68.555,28.219) ; L2.1@69.206,28.099 ccw(c68.919,27.816) 68.919,28.219 ccw(c68.919,28.622) L2.1@69.206,28.34 ; L2.1@69.328,28.219 v1(68.555,28.219)
  Bottom Layer w0.152: R12.1@67.781,28.219 v1(68.555,28.219) ; R12.1@67.904,28.099 cw(c68.191,27.816) 68.191,28.219 cw(c68.191,28.622) R12.1@67.904,28.34 ; R12.1@68.012,27.992 cw(c68.555,27.458) v1(68.555,28.219) ; R12.1@68.012,28.447 ccw(c68.555,28.981) v1(68.555,28.219) ; v1@68.446,28.157 ccw(c68.184,28.006) 68.262,28.298 ccw(c68.341,28.59) v1@68.492,28.328 ; v1@68.446,28.282 cw(c68.184,28.433) 68.262,28.141 cw(c68.341,27.849) v1@68.492,28.111 ; v1@68.466,28.131 ccw(c68.252,27.917) 68.252,28.219 ccw(c68.252,28.522) v1@68.466,28.308
NetL3_2: L3.2 R31.2 | length 3.1
  Top Layer w0.381: L3.2@67.875,37.425 R31.2@69.4,37.425 ; L3.2@68.073,37.277 cw(c68.431,36.919) 68.431,37.425 cw(c68.431,37.931) L3.2@68.073,37.573 ; R31.2@69.202,37.277 ccw(c68.844,36.919) 68.844,37.425 ccw(c68.844,37.931) R31.2@69.202,37.573
NetL4_1: L4.1 R18.1 | length 5.6
  Top Layer w0.203: L4.1@57.889,20.014 cw(c57.38,19.505) 58.1,19.505 cw(c58.82,19.505) L4.1@58.311,20.014 ; v1@58.029,18.971 ccw(c57.859,19.141) 58.1,19.141 ccw(c58.341,19.141) v1@58.171,18.971 ; v1(58.1,18.9) L4.1@58.1,20.225
  Bottom Layer w0.203: R18.1@57.905,18.473 ccw(c57.535,18.9) v1(58.1,18.9) ; v1@58.013,18.85 cw(c57.805,18.729) 58.038,18.667 cw(c58.271,18.605) v1@58.15,18.813 ; v1@58.029,18.829 cw(c57.859,18.659) 58.1,18.659 cw(c58.341,18.659) v1@58.171,18.829 ; v1@58.05,18.813 cw(c57.929,18.605) 58.162,18.667 cw(c58.395,18.729) v1@58.187,18.85 ; R18.1@58.1,18.247 v1(58.1,18.9) ; R18.1@58.295,18.473 cw(c58.665,18.9) v1(58.1,18.9)
NetL5_1: L5.1 R19.1 | length 5.6
  Top Layer w0.203: L5.1@56.498,20.018 cw(c55.989,19.509) 56.709,19.509 cw(c57.429,19.509) L5.1@56.92,20.018 ; v1@56.641,18.969 ccw(c56.476,19.134) 56.709,19.134 ; 56.709,19.145 ccw(c56.958,19.145) v1@56.782,18.969 ; L5.1@56.709,20.229 56.709,18.931 v1@56.74,18.9
  Bottom Layer w0.203: R19.1@56.516,18.478 ccw(c56.16,18.896) v1@56.709,18.896 ; v1@56.625,18.849 cw(c56.421,18.731) 56.648,18.67 ; v1@56.641,18.828 cw(c56.476,18.663) 56.709,18.663 ; 56.646,18.662 cw(c56.885,18.599) v1@56.761,18.812 ; v1@56.661,18.812 cw(c56.545,18.612) 56.769,18.672 ; R19.1@56.709,18.251 v1@56.709,18.896 ; 56.709,18.652 cw(c56.958,18.652) v1@56.782,18.828 ; v1(56.711,18.899) 56.713,18.9 v1@56.74,18.9 ; 56.773,18.659 cw(c57.015,18.723) v1@56.798,18.849 ; R19.1@56.902,18.478 cw(c57.258,18.896) v1@56.709,18.896
NetL6_1: L6.1 R13.1 | length 8.1
  Top Layer w0.152: v1@68.617,29.609 cw(c68.769,29.347) 68.847,29.64 cw(c68.925,29.932) v1@68.663,29.781 ; v1@68.617,29.827 ccw(c68.769,30.089) 68.847,29.796 ccw(c68.925,29.504) v1@68.663,29.655 ; v1@68.643,29.629 cw(c68.857,29.415) 68.857,29.718 cw(c68.857,30.02) v1@68.643,29.807 ; L6.1@69.097,29.491 ccw(c68.555,28.957) v1(68.555,29.718) ; L6.1@69.097,29.945 cw(c68.555,30.479) v1(68.555,29.718) ; L6.1@69.206,29.598 ccw(c68.919,29.315) 68.919,29.718 ccw(c68.919,30.121) L6.1@69.206,29.838 ; L6.1@69.328,29.718 v1(68.555,29.718)
  Bottom Layer w0.152: R13.1@67.781,29.718 v1(68.555,29.718) ; R13.1@67.904,29.598 cw(c68.191,29.315) 68.191,29.718 cw(c68.191,30.121) R13.1@67.904,29.838 ; R13.1@68.012,29.491 cw(c68.555,28.957) v1(68.555,29.718) ; R13.1@68.012,29.945 ccw(c68.555,30.479) v1(68.555,29.718) ; v1@68.446,29.655 ccw(c68.184,29.504) 68.262,29.796 ccw(c68.341,30.089) v1@68.492,29.827 ; v1@68.446,29.781 cw(c68.184,29.932) 68.262,29.64 cw(c68.341,29.347) v1@68.492,29.609 ; v1@68.466,29.629 ccw(c68.252,29.415) 68.252,29.718 ccw(c68.252,30.02) v1@68.466,29.807
NetLED2_2: LED2.2 R7.1 | length 3.7
  Top Layer w0.102: LED2.2@39.435,8.324 v1@40.462,8.324 ; LED2.2@39.597,8.162 cw(c39.987,7.772) 39.987,8.324 cw(c39.987,8.876) LED2.2@39.597,8.486 ; LED2.2@39.668,8.091 cw(c40.232,7.527) 40.232,8.324 cw(c40.232,9.121) LED2.2@39.668,8.557 ; 40.081,8.324 ccw(c40.081,8.712) v1@40.356,8.438 ; 40.116,8.324 cw(c40.116,7.985) v1@40.356,8.225
  other v1: 40.462,8.331
NetLS2_2: LS2.2 Q1.1 | length 10
  Bottom Layer w0.381: LS2.2@9.4,42.401 cw(c7.589,40.59) Q1.1@10.15,40.59 ; LS2.2@9.669,42.67 cw(c8.509,41.51) 10.15,41.51 ; Q1.1@10.055,40.58 ccw(c9.777,40.741) Q1.1@10.087,40.824 ; Q1.1@10.15,40.25 LS2.2@10.149,43.15 ; Q1.1@10.15,40.595 cw(c12.704,40.595) LS2.2@10.898,42.401 ; 10.15,41.514 cw(c11.785,41.514) LS2.2@10.629,42.67 ; 10.212,40.827 ccw(c10.527,40.743) Q1.1@10.245,40.58
NetQ1_2: Q1.3 R5.1 | length 3.8
  Bottom Layer w0.254: Q1.3@11.1,38 R5.1@13.175,38 ; Q1.3@11.222,37.878 cw(c11.518,37.582) 11.518,38 cw(c11.518,38.418) Q1.3@11.222,38.122 ; R5.1@12.982,37.807 ccw(c12.516,37.341) 12.516,38 ccw(c12.516,38.659) R5.1@12.982,38.193
NetR6_2: R6.2 SW2.1 SW2.2 SW2.3 SW2.4 | length 11.1
  Top Layer w0.254: SW2.4@25.07,10.867 ccw(c24.774,11.163) 25.192,11.163 ccw(c25.61,11.163) SW2.4@25.314,10.867 ; SW2.3@25.07,11.893 cw(c24.774,11.597) 25.192,11.597 cw(c25.61,11.597) SW2.3@25.314,11.893 ; SW2.3@25.07,12.137 ccw(c24.774,12.433) 25.192,12.433 ccw(c25.61,12.433) SW2.3@25.314,12.137 ; SW2.2@25.07,13.163 cw(c24.774,12.867) 25.192,12.867 cw(c25.61,12.867) SW2.2@25.314,13.163 ; SW2.2@25.07,13.407 ccw(c24.774,13.703) 25.192,13.703 ccw(c25.61,13.703) SW2.2@25.314,13.407 ; SW2.1@25.07,14.433 cw(c24.774,14.137) 25.192,14.137 cw(c25.61,14.137) SW2.1@25.314,14.433 ; SW2.1@25.192,14.555 SW2.2@25.192,13.285 SW2.3@25.192,12.015 SW2.4@25.192,10.745 v1@26.595,10.745 ; SW2.4@26.114,10.623 cw(c26.41,10.327) 26.41,10.745 cw(c26.41,11.163) SW2.4@26.114,10.867 ; 26.373,10.745 ccw(c26.373,11.027) v1@26.572,10.828
  Bottom Layer w0.254: v1(26.625,10.775) 27.175,10.775 27.325,10.925 R6.2@27.325,11.25
NetR22_2: R22.2 R25.2 U7.4 | length 6.7
  Top Layer w0.254: v1(79.6,16.1) 79.604,16.096 U7.4@79.604,15.041 79.604,14.121 ; v1@79.965,14.066 cw(c79.822,14.339) 79.604,14.121 ; v1(80,14) 79.725,14 79.604,14.121
  Bottom Layer w0.254: v1@79.581,16.172 ccw(c79.472,16.577) 79.835,16.367 ; R25.2@79.62,16.72 cw(c79.28,16.421) v1(79.6,16.1) 79.875,16.375 ; R25.2@79.718,16.677 cw(c79.507,16.375) 79.875,16.375 ; 79.792,16.292 ccw(c79.483,16.6) R25.2@79.811,16.887 ; R25.2@79.875,16.9 79.875,16.375 ; 79.983,16.483 ccw(c79.687,16.779) R25.2@80.002,17.055 ; R25.2@80.032,16.677 ccw(c80.243,16.375) 79.875,16.375
NetR29_2: R29.2 U6.5 | length 5.9
  Top Layer w0.203: U6.5@68.825,20.675 70.825,20.675 71.55,19.95 R29.2@71.9,19.95 ; 70.825,20.675 ccw(c71.751,21.601) R29.2@71.872,20.297 ; 71.131,20.369 ccw(c71.803,21.041) R29.2@71.891,20.095 ; 71.437,20.063 ccw(c71.855,20.482) R29.2@71.91,19.892
NetR30_2: R30.2 U1.G1 U1.G2 | length 3.9
  Top Layer w0.508: R30.2@38.25,15.775 38.25,16.525 39.2,17.475 U1.G1@39.2,18.3 U1.G2@39.2,19.3
PTA4: R9.2 U1.L7 | length 5.7
  Top Layer w0.152: U1.L7@43.2,24.126 cw(c43.2,23.707) 43.497,24.003 cw(c43.793,24.3) U1.L7@43.374,24.3 ; U1.L7@43.2,24.3 v1(43.7,23.8) ; v1@43.575,23.8 ccw(c43.272,23.8) 43.486,24.014 ccw(c43.7,24.228) v1@43.7,23.925
  Bottom Layer w0.152: v1@43.668,23.921 ccw(c43.535,24.414) R9.2@43.978,24.159 ; v1(43.7,23.8) v1@43.725,23.8 ; v1@43.7,23.925 ccw(c43.7,24.288) R9.2@43.957,24.032 ; v1@43.732,23.921 ccw(c43.822,24.254) 43.994,23.956 ; v1@43.821,23.768 cw(c44.072,23.7) 43.942,23.925 ; v1@43.825,23.8 cw(c44.067,23.8) 43.896,23.971 ; v1@43.833,23.908 ccw(c43.365,24.375) R9.2@44.026,24.375 ; R9.2@43.98,24.055 cw(c44.339,23.695) R9.2@44.347,24.204 ; R9.2@44.345,24.051 ccw(c44.332,23.193) v1@43.725,23.8 ; R9.2@44.35,24.425 v1@43.725,23.8
PTA5: U1.M8 U5.8 | length 66.2
  Top Layer w0.102: U1.M8@44.2,25.3 v1(45.2,25.3) ; U1.M8@44.341,25.159 cw(c44.681,24.819) 44.681,25.3 cw(c44.681,25.781) U1.M8@44.341,25.441 ; v1@45.093,25.193 ccw(c44.836,24.936) 44.836,25.3 ccw(c44.836,25.664) v1@45.093,25.407
  Bottom Layer w0.102: v1(45.2,25.3) 51.64,25.3 52,25.66 52,44.625 52.225,44.85 74.4,44.85 74.85,45.3 74.85,49.435 U5.8@73.57,50.715 ; v1@45.307,25.193 cw(c45.564,24.936) 45.564,25.3 cw(c45.564,25.664) v1@45.307,25.407 ; U5.8@73.57,50.016 cw(c73.57,48.328) 74.764,49.521 cw(c75.957,50.715) U5.8@74.269,50.715 ; U5.8@73.57,50.117 cw(c73.57,48.675) 74.59,49.695 cw(c75.61,50.715) U5.8@74.168,50.715 ; U5.8@73.57,50.219 cw(c73.57,49.022) 74.417,49.868 cw(c75.263,50.715) U5.8@74.066,50.715 ; U5.8@73.57,50.321 cw(c73.57,49.368) 74.243,50.042 cw(c74.917,50.715) U5.8@73.964,50.715
PTA11: P3.12 U1.L9 U5.6 | length 82.9
  Top Layer w0.102: U1.L9@43.2,26.3 43.7,26.8 46.775,26.8 48.525,28.55 48.525,45.4 48.375,45.55 44,45.55 43.856,45.694 P3.12@43.856,48.185 44.921,49.25 69.565,49.25 U5.6@71.03,50.715 ; U1.L9@43.2,26.499 ccw(c43.2,26.98) 43.54,26.64 ccw(c43.88,26.3) U1.L9@43.399,26.3 ; P3.12@43.362,47.691 cw(c42.168,46.497) 43.856,46.497 cw(c45.544,46.497) P3.12@44.35,47.691 ; P3.12@43.433,47.762 cw(c42.413,46.742) 43.856,46.742 cw(c45.299,46.742) P3.12@44.279,47.762 ; P3.12@43.505,47.834 cw(c42.659,46.988) 43.856,46.988 cw(c45.053,46.988) P3.12@44.207,47.834 ; P3.12@43.577,47.906 cw(c42.904,47.233) 43.856,47.233 cw(c44.808,47.233) P3.12@44.135,47.906 ; P3.12@43.889,48.578 ccw(c43.949,49.293) 44.457,48.786 ccw(c44.964,48.278) P3.12@44.249,48.218 ; P3.12@43.898,48.679 ccw(c43.973,49.579) 44.611,48.94 ccw(c45.25,48.302) P3.12@44.35,48.227 ; P3.12@43.906,48.78 ccw(c43.997,49.864) 44.766,49.095 ccw(c45.535,48.326) P3.12@44.451,48.235 ; P3.12@43.915,48.882 ccw(c44.021,50.15) 44.921,49.25 ccw(c45.821,48.35) P3.12@44.553,48.244 ; U5.6@70.331,50.715 cw(c68.643,50.715) 69.836,49.521 cw(c71.03,48.328) U5.6@71.03,50.016 ; U5.6@70.432,50.715 cw(c68.99,50.715) 70.01,49.695 cw(c71.03,48.675) U5.6@71.03,50.117 ; U5.6@70.534,50.715 cw(c69.337,50.715) 70.183,49.868 cw(c71.03,49.022) U5.6@71.03,50.219 ; U5.6@70.636,50.715 cw(c69.683,50.715) 70.357,50.042 cw(c71.03,49.368) U5.6@71.03,50.321
PTA12: P3.14 U1.K9 U5.4 | length 79.9
  Top Layer w0.102: P3.14@41.316,48.185 42.584,49.453 67.228,49.453 U5.4@68.49,50.715 ; P3.14@41.316,48.579 ccw(c41.316,49.532) 41.989,48.858 ccw(c42.663,48.185) P3.14@41.71,48.185 ; P3.14@41.316,48.681 ccw(c41.316,49.878) 42.163,49.032 ccw(c43.009,48.185) P3.14@41.812,48.185 ; P3.14@41.316,48.783 ccw(c41.316,50.225) 42.336,49.205 ccw(c43.356,48.185) P3.14@41.914,48.185 ; P3.14@41.316,48.884 ccw(c41.316,50.572) 42.51,49.379 ccw(c43.703,48.185) P3.14@42.015,48.185 ; U1.K9@42.2,26.3 v1(42.7,26.8) ; U1.K9@42.2,26.499 ccw(c42.2,26.98) 42.54,26.64 ccw(c42.88,26.3) U1.K9@42.399,26.3 ; U1.K9@42.295,26.499 ccw(c42.018,26.979) v1@42.554,26.838 ; U1.K9@42.399,26.395 cw(c42.879,26.118) v1@42.738,26.654 ; 42.506,26.62 ccw(c42.349,26.892) v1@42.653,26.812 ; 42.511,26.623 ccw(c42.458,26.715) v1@42.558,26.75 ; 42.52,26.606 cw(c42.792,26.449) v1@42.712,26.753 ; 42.523,26.611 cw(c42.615,26.558) v1@42.65,26.658 ; v1@42.549,26.8 cw(c42.185,26.8) 42.443,26.543 cw(c42.7,26.285) v1@42.7,26.649 ; U5.4@67.791,50.715 cw(c66.103,50.715) 67.296,49.521 cw(c68.49,48.328) U5.4@68.49,50.016 ; U5.4@67.892,50.715 cw(c66.45,50.715) 67.47,49.695 cw(c68.49,48.675) U5.4@68.49,50.117 ; U5.4@67.994,50.715 cw(c66.797,50.715) 67.643,49.868 cw(c68.49,49.022) U5.4@68.49,50.219 ; U5.4@68.096,50.715 cw(c67.143,50.715) 67.817,50.042 cw(c68.49,49.368) U5.4@68.49,50.321 ; 42.537,26.638 cw(c42.619,26.496) 42.661,26.654 ccw(c42.619,26.496) 42.537,26.638 ; 42.538,26.637 ccw(c42.396,26.719) 42.554,26.761 cw(c42.396,26.719) 42.538,26.637
  Bottom Layer w0.102: P3.14@40.822,47.691 cw(c39.628,46.497) 41.316,46.497 cw(c43.004,46.497) P3.14@41.81,47.691 ; P3.14@40.893,47.762 cw(c39.873,46.742) 41.316,46.742 cw(c42.759,46.742) P3.14@41.739,47.762 ; P3.14@40.965,47.834 cw(c40.119,46.988) 41.316,46.988 cw(c42.513,46.988) P3.14@41.667,47.834 ; P3.14@41.037,47.906 cw(c40.364,47.233) 41.316,47.233 cw(c42.268,47.233) P3.14@41.595,47.906 ; P3.14@41.316,48.185 41.316,45.725 42.291,44.75 42.291,27.209 v1(42.7,26.8) ; v1@42.549,26.8 ccw(c42.185,26.8) 42.443,27.057 ccw(c42.7,27.315) v1@42.7,26.951
PTA13: P3.16 U1.J9 U5.2 | length 75
  Top Layer w0.102: P3.16@38.776,48.185 40.247,49.656 64.891,49.656 ; P3.16@38.776,48.579 ccw(c38.776,49.532) 39.449,48.858 ccw(c40.123,48.185) P3.16@39.17,48.185 ; P3.16@38.776,48.681 ccw(c38.776,49.878) 39.623,49.032 ccw(c40.469,48.185) P3.16@39.272,48.185 ; P3.16@38.776,48.783 ccw(c38.776,50.225) 39.796,49.205 ccw(c40.816,48.185) P3.16@39.374,48.185 ; P3.16@38.776,48.884 ccw(c38.776,50.572) 39.97,49.379 ccw(c41.163,48.185) P3.16@39.475,48.185 ; U1.J9@41.2,26.3 v1(41.7,26.8) ; U1.J9@41.2,26.499 ccw(c41.2,26.98) 41.54,26.64 ccw(c41.88,26.3) U1.J9@41.399,26.3 ; U1.J9@41.295,26.499 ccw(c41.018,26.979) v1@41.554,26.838 ; U1.J9@41.399,26.395 cw(c41.879,26.118) v1@41.738,26.654 ; 41.506,26.62 ccw(c41.349,26.892) v1@41.653,26.812 ; 41.511,26.623 ccw(c41.458,26.715) v1@41.558,26.75 ; 41.52,26.606 cw(c41.792,26.449) v1@41.712,26.753 ; 41.523,26.611 cw(c41.615,26.558) v1@41.65,26.658 ; v1@41.549,26.8 cw(c41.185,26.8) 41.443,26.543 cw(c41.7,26.285) v1@41.7,26.649 ; U5.2@65.254,50.653 cw(c64.005,50.542) 64.891,49.656 ; U5.2@65.355,50.662 cw(c64.288,50.568) 65.045,49.81 cw(c65.803,49.053) U5.2@65.897,50.12 ; U5.2@65.456,50.671 cw(c64.571,50.593) 65.199,49.964 cw(c65.828,49.336) U5.2@65.906,50.221 ; U5.2@65.557,50.68 cw(c64.853,50.618) 65.353,50.118 cw(c65.853,49.618) U5.2@65.915,50.322 ; U5.2@65.888,50.019 ccw(c65.777,48.77) 64.891,49.656 ; U5.2@65.95,50.715 64.891,49.656 ; 41.537,26.638 cw(c41.619,26.496) 41.661,26.654 ccw(c41.619,26.496) 41.537,26.638 ; 41.538,26.637 ccw(c41.396,26.719) 41.554,26.761 cw(c41.396,26.719) 41.538,26.637
  Bottom Layer w0.102: P3.16@38.416,47.586 cw(c38.033,46.949) 38.776,46.949 ; P3.16@38.468,47.673 cw(c38.141,47.129) 38.776,47.129 cw(c39.411,47.129) P3.16@39.084,47.673 ; P3.16@38.521,47.76 cw(c38.249,47.308) 38.776,47.308 cw(c39.303,47.308) P3.16@39.031,47.76 ; P3.16@38.776,48.185 38.776,46.949 ; P3.16@39.136,47.586 ccw(c39.519,46.949) 38.776,46.949 ; v1(41.7,26.8) 42.088,27.188 42.088,43.637 38.776,46.949 ; v1@41.7,26.951 ccw(c41.7,27.315) 41.957,27.057 ccw(c42.215,26.8) v1@41.851,26.8
PTA14: U1.L10 U5.1 | length 56.3
  Top Layer w0.102: U1.L10@43.2,27.3 v1(43.7,27.8) ; U1.L10@43.2,27.499 ccw(c43.2,27.98) 43.54,27.64 ccw(c43.88,27.3) U1.L10@43.399,27.3 ; U1.L10@43.295,27.499 ccw(c43.018,27.979) v1@43.554,27.838 ; U1.L10@43.399,27.395 cw(c43.879,27.118) v1@43.738,27.654 ; 43.506,27.62 ccw(c43.349,27.892) v1@43.653,27.812 ; 43.511,27.623 ccw(c43.458,27.715) v1@43.558,27.75 ; 43.52,27.606 cw(c43.792,27.449) v1@43.712,27.753 ; 43.523,27.611 cw(c43.615,27.558) v1@43.65,27.658 ; v1@43.549,27.8 cw(c43.185,27.8) 43.443,27.543 cw(c43.7,27.285) v1@43.7,27.649 ; v1(64.875,45.35) 65.475,45.35 65.95,45.825 U5.1@65.95,48.175 ; v1@64.982,45.243 cw(c65.239,44.986) 65.239,45.35 cw(c65.239,45.714) v1@64.982,45.457 ; U5.1@65.456,47.681 cw(c64.262,46.487) 65.95,46.487 cw(c67.638,46.487) U5.1@66.444,47.681 ; U5.1@65.527,47.752 cw(c64.507,46.732) 65.95,46.732 cw(c67.393,46.732) U5.1@66.373,47.752 ; U5.1@65.599,47.824 cw(c64.753,46.978) 65.95,46.978 cw(c67.147,46.978) U5.1@66.301,47.824 ; U5.1@65.671,47.896 cw(c64.998,47.223) 65.95,47.223 cw(c66.902,47.223) U5.1@66.229,47.896 ; 43.537,27.638 cw(c43.619,27.496) 43.661,27.654 ccw(c43.619,27.496) 43.537,27.638 ; 43.538,27.637 ccw(c43.396,27.719) 43.554,27.761 cw(c43.396,27.719) 43.538,27.637
  Bottom Layer w0.102: v1(43.7,27.8) 51.325,27.8 51.7,28.175 51.7,45.248 51.802,45.35 v1(64.875,45.35) ; v1@43.807,27.693 cw(c44.064,27.436) 44.064,27.8 cw(c44.064,28.164) v1@43.807,27.907 ; v1@64.768,45.243 ccw(c64.511,44.986) 64.511,45.35 ccw(c64.511,45.714) v1@64.768,45.457